# Altium PCB AX5243_module_pcb.PcbDoc
Units mm, origin at the board's own origin, x right, y up, seen from the top; angles counter-clockwise.
Board outline 49.91 x 49.91 mm, 2 copper layers (Top Layer, Bottom Layer); 40 components, 29 nets, 118 pads, 4 vias.
Unrouted connection lines stored in the file: 64.
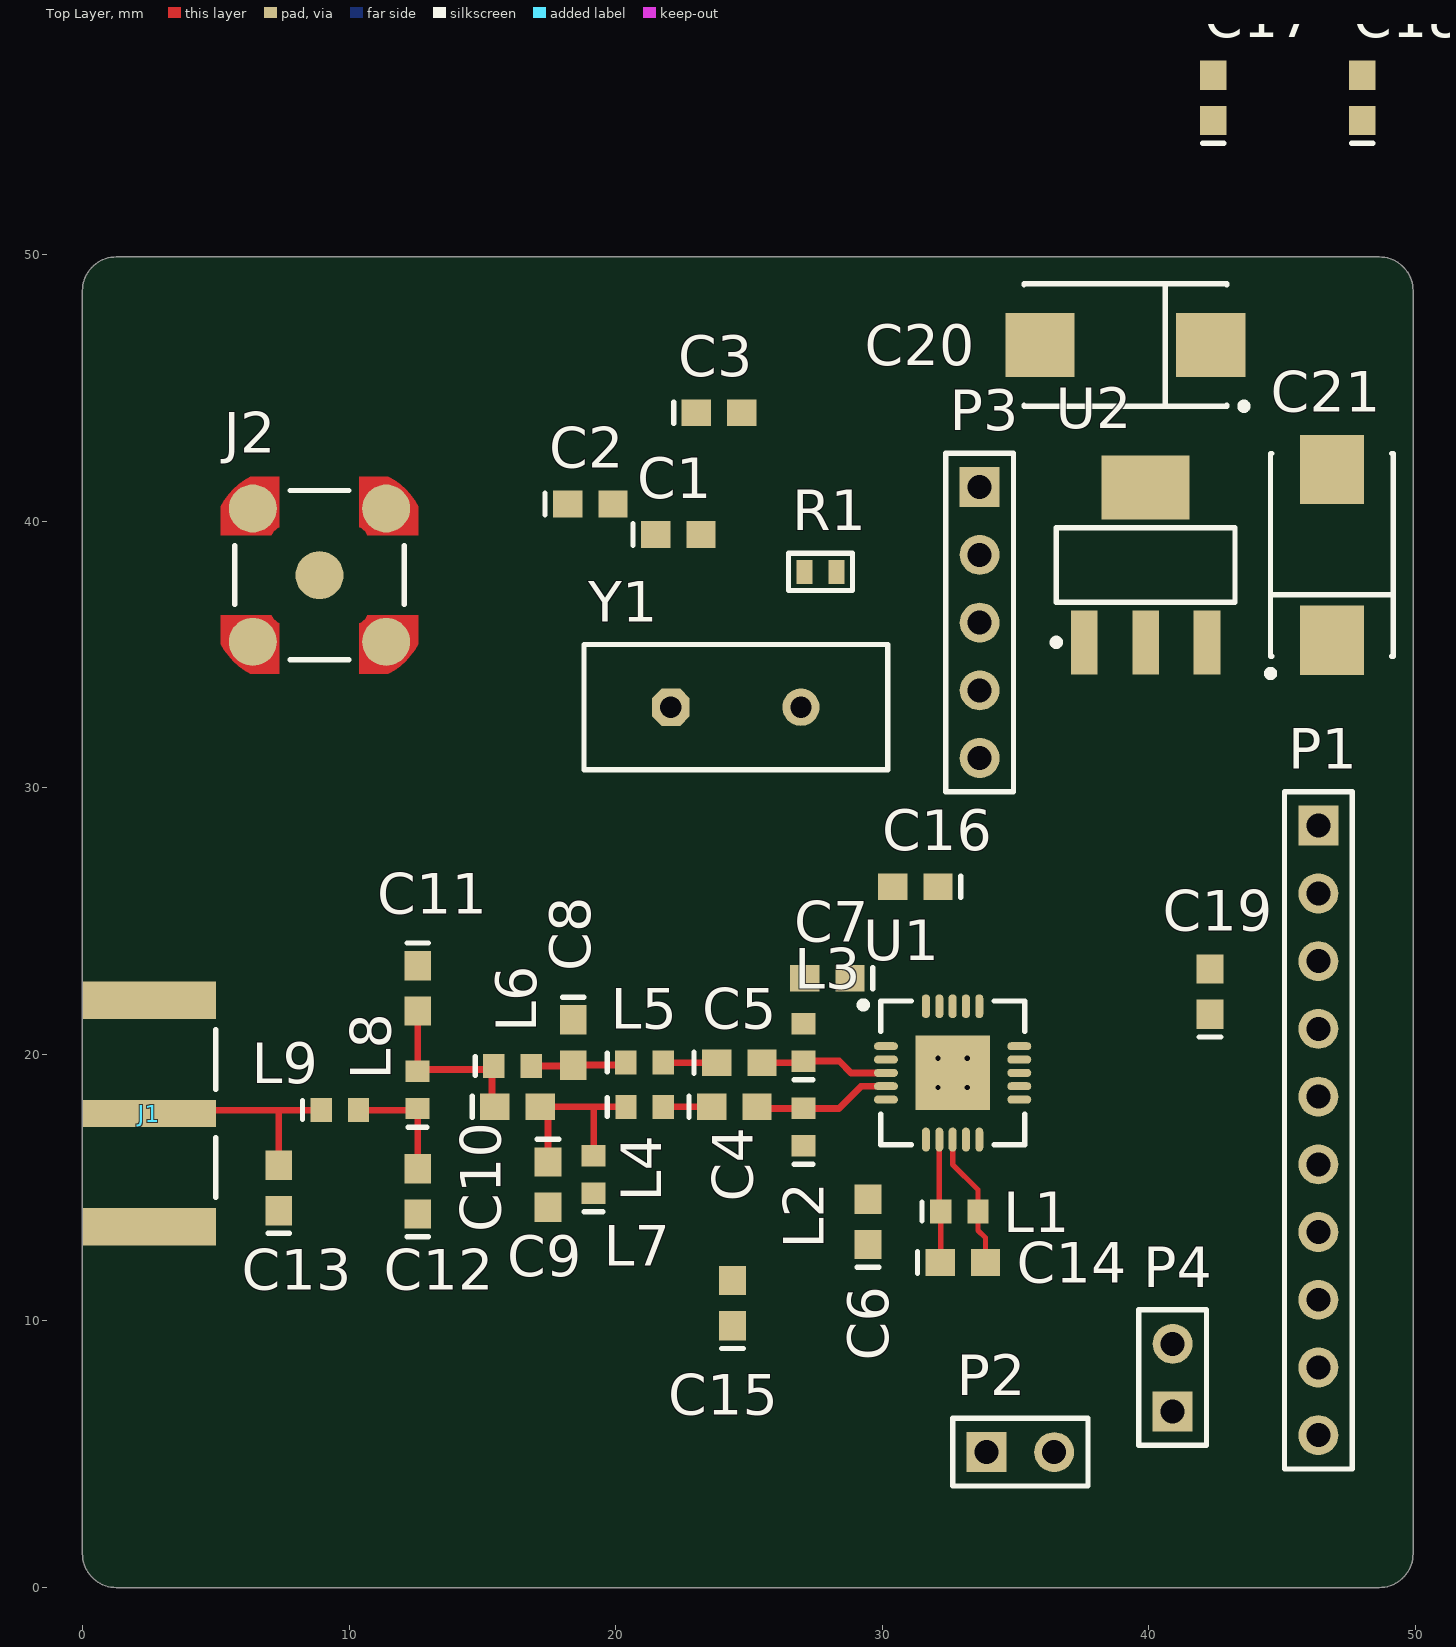
[diagram p0: Top Layer view]
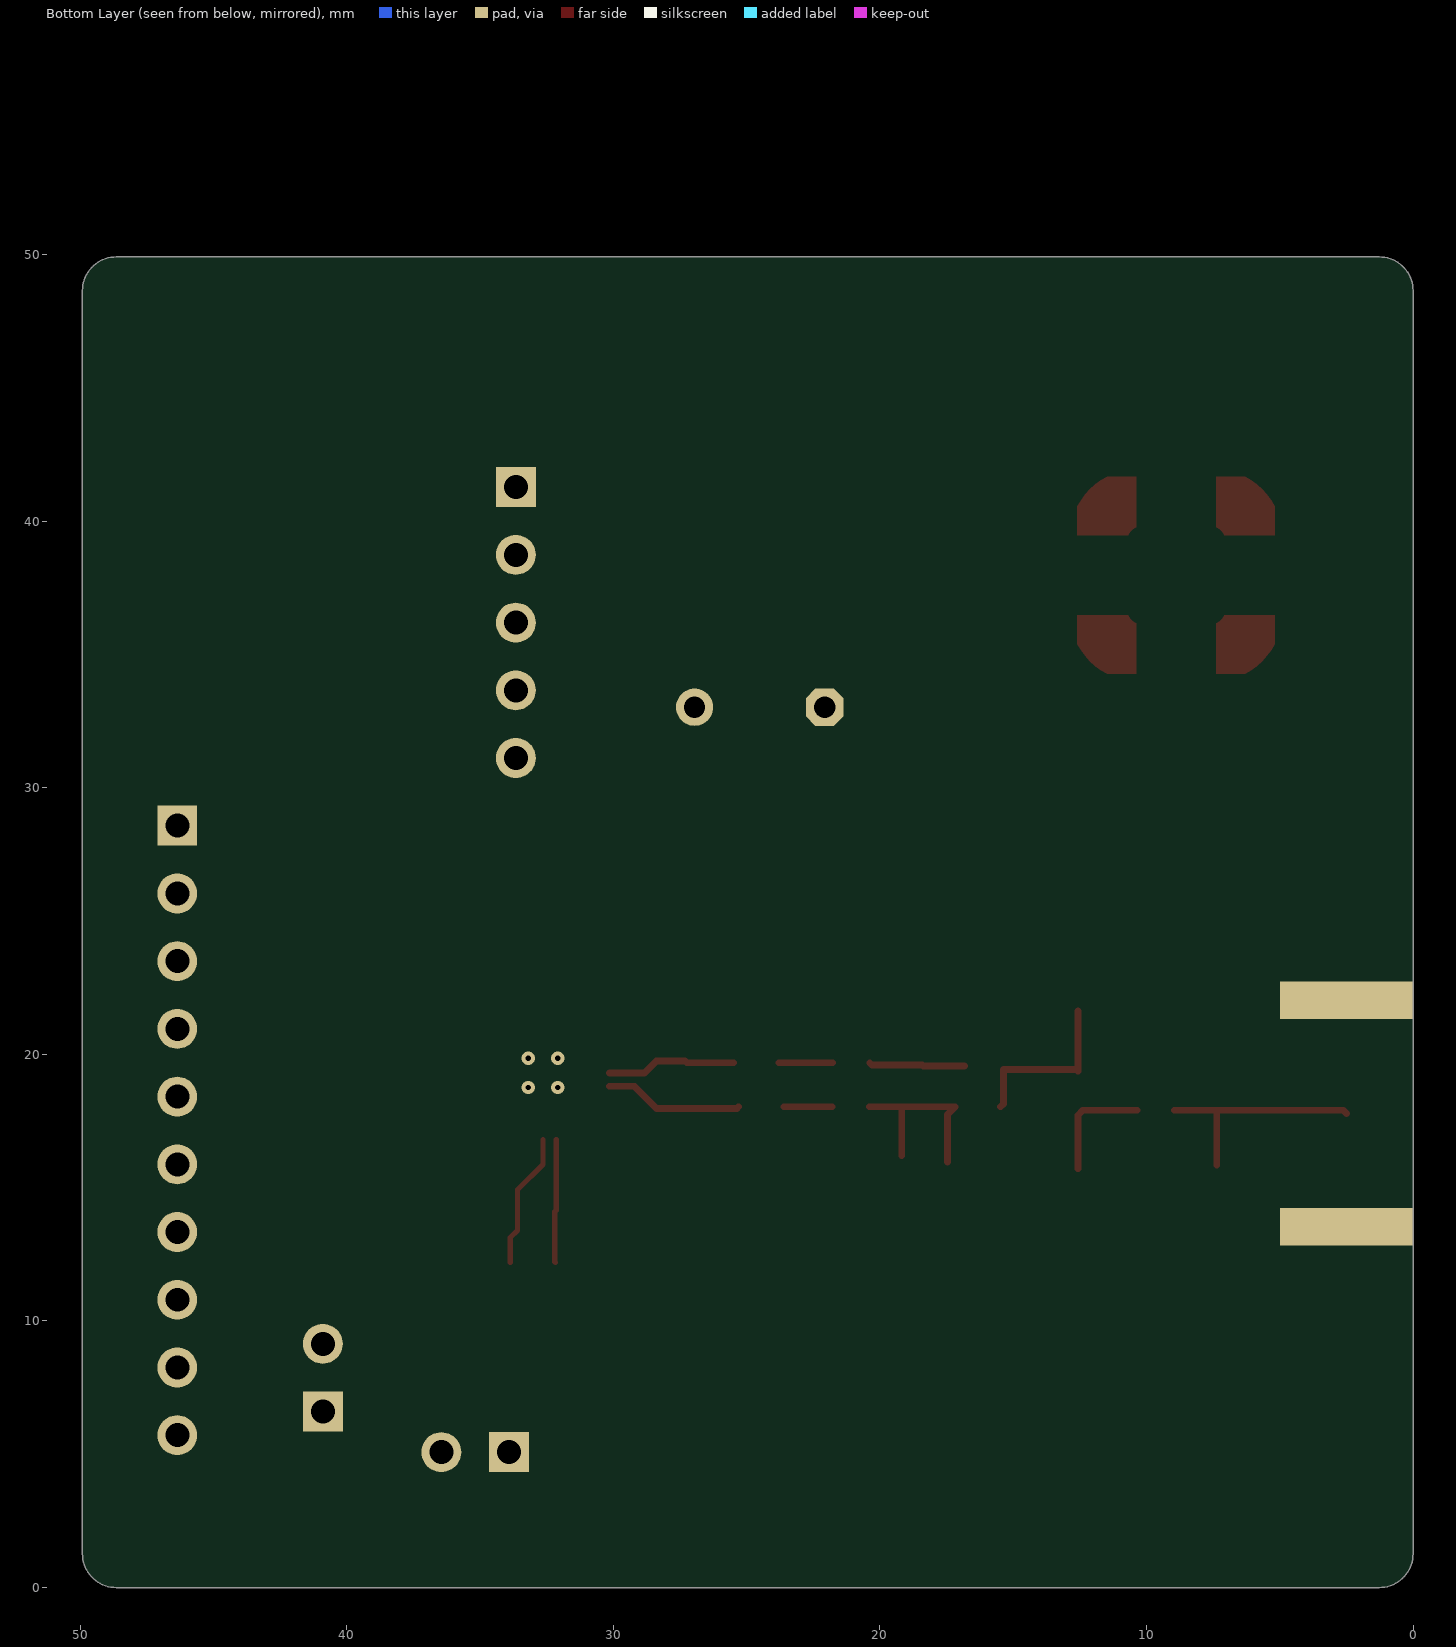
[diagram p1: Bottom Layer view, seen from below]

## Layer stack, top to bottom
Top Solder: solder mask 0.0102, Solder Resist, Dk 3.5
Top Layer: signal copper 0.0356
Dielectric 1: dielectric 0.32, FR-4, Dk 4.8
Bottom Layer: signal copper 0.0356
Bottom Solder: solder mask 0.0102, Solder Resist, Dk 3.5

## Board outline
0,1.27 0,48.641 cw(c1.27,48.641) 1.27,49.911 48.641,49.911 cw(c48.641,48.641) 49.911,48.641 49.911,1.27 cw(c48.641,1.27) 48.641,0 1.27,0 cw(c1.27,1.27)

## Design rules (kind name [scope] priority, off if disabled: settings)
Clearance [All] p1: gap=0.2 ignorepadtopadclearanceinfootprint=FALSE
PolygonConnect [All] p1: connectstyle=Relief reliefconductorwidth=0.254 reliefentries=4 polygonreliefangle="90 Angle" airgapwidth=0.254
RoomDefinition AX5243_schema [InComponentClass('AX5243_schema')] p1: confinementstyle=ConfineIn formatcopy=TRUE lockcomponents=FALSE outline 51.054,1.524 59.944,1.524 59.944,7.112 51.054,7.112
RoutingVias [All] p1: holewidth=0.711 width=1.27 viastyle="Through Hole" minholewidth=0.711 minwidth=1.27 maxholewidth=0.711 maxwidth=1.27
SolderMaskExpansion [All] p1: expansion=0.102
Width [All] p1: maxlimit=4 minlimit=0.15 preferedwidth=0.25
30 further rules are at their usual default settings.

## Components (designator, comment, footprint, x,y, rotation, side; value= is the part's Value field where it differs from the comment)
C1 "C0603" 0603 22.352,39.497 r0 top value=1nF
C2 "C0603" 0603 19.05,40.64 r0 top value=1nF
C3 "C0603" 0603 23.876,44.069 r0 top value=6.8pF
C4 "C0603" 0603 24.449,18.034 r0 top value=10pF
C5 "C0603" 0603 24.638,19.685 r0 top value=10pF
C6 "C0603" 0603 29.464,13.716 r90 top value=10pF
C7 "C0603" 0603 27.94,22.86 r180 top value=10pF
C8 "C0603" 0603 18.415,20.447 r270 top value=12pF
C9 "C0603" 0603 17.464,15.113 r270 top value=0pF
C10 "C0603" 0603 16.321,18.034 r0 top value=12pF
C11 "C0603" 0603 12.573,22.479 r270 top value=75pF
C12 "C0603" 0603 12.573,14.859 r90 top value=130pF
C13 "C0603" 0603 7.366,14.986 r90 top value=75pF
C14 "C0603" 0603 33.02,12.192 r0 top value=100pF
C15 "C0603" 0603 24.384,10.668 r90 top value=100nF
C16 "C0603" 0603 31.242,26.289 r180 top value=100nF
C17 "C0603" 0603 42.418,55.88 r90 top value=100nF
C18 "C0603" 0603 48.006,55.88 r90 top value=100nF
C19 "C0603" 0603 42.291,22.352 r90 top value=100nF
C20 "T495D" D 39.116,46.609 r180 top value=15uF
C21 "T495D" D 46.863,38.735 r90 top value=15uF
J1 "32K145-400L5" ROS-32K145-400L5_V 0,17.78 r90 top
J2 "32K10A-40ML5" ROS-32K10A-40ML5_V 8.89,37.973 r90 top
L1 "Inductor" INDC1608L 32.893,14.097 r0 top value=120nH
L2 "Inductor" INDC1608L 27.051,17.272 r90 top value=150nH
L3 "Inductor" INDC1608L 27.051,20.447 r90 top value=150nH
L4 "Inductor" INDC1608L 21.085,18.034 r0 top value=120nH
L5 "Inductor" INDC1608L 21.082,19.685 r0 top value=120nH
L6 "Inductor" INDC1608L 16.129,19.558 r0 top value=68nH
L7 "Inductor" INDC1608L 19.177,15.494 r90 top value=120nH
L8 "Inductor" INDC1608L 12.573,18.669 r90 top value=270nH
L9 "Inductor" INDC1608L 9.652,17.907 r0 top value=270nH
P1 "Header 10" HDR1X10 46.355,28.575 r270 top
P2 "ExtVCO" HDR1X2 33.909,5.08 r0 top
P3 "GP ADC" HDR1X5 33.655,41.275 r270 top
P4 "Ext VCO Tune" HDR1X2 40.894,6.604 r90 top
R1 "1k 0603" R0603 27.686,38.1 r0 top
U1 "AX5243" "QFN20 4,00x4,00mm ON Semi" 32.664,19.279 r0 top
U2 "LM1117IMP-3.3/NOPB" MP04A_N 39.878,38.354 r90 top
Y1 "ECS-10-13-1" HC-49U 24.511,33.02 r0 top

## Footprints (in the part's own frame and the unit in brackets; to place one, negate y for a bottom-side part, rotate by r counter-clockwise, add the part's x,y. Pads: shape width x height; smd on the part's side, far side on the other; paste and mask are expansions set on the pad)
0603 [mm] "Chip Capacitor; Body 1.6 x 0.8 mm (LxW typ)"
  rect 1.1x1 smd: 1(-0.85,0) 2(0.85,0)
  silkscreen extent -1.7,-0.4 -1.7,0.4
D [mm] "Capacitor, SM Tantalum; Body 7.3 x 4.3 mm (LxW typ)"
  rect 2.6x2.4 smd: 1(-3.2,0) 2(3.2,0)
  silkscreen extent -4.58,-2.3 3.8,2.42
HC-49U [mm] "Quartz Crystal, Thru-Hole; 2 Leads; Body 11.35 x 4.65 x 13.46 mm (LxWxH max)"
  oct 1.4x1.4 hole 0.8: 1(-2.44,0)
  round 1.4 hole 0.8: 2(2.44,0)
  silkscreen extent -5.7,-2.35 5.7,2.35
HDR1X2 [mm] "Connector; Header; 2 Position"
  rect 1.5x1.5 hole 0.9: 1(0,0)
  round 1.5 hole 0.9: 2(2.54,0)
  silkscreen extent -1.27,-1.27 3.81,1.27
HDR1X5 [mm] "Connector; Header; 5 Position"
  rect 1.5x1.5 hole 0.9: 1(0,0)
  round 1.5 hole 0.9: 2(2.54,0) 3(5.08,0) 4(7.62,0) 5(10.16,0)
  silkscreen extent -1.27,-1.27 11.43,1.27
HDR1X10 [mm] "Connector; Header; 10 Position"
  rect 1.5x1.5 hole 0.9: 1(0,0)
  round 1.5 hole 0.9: 2(2.54,0) 3(5.08,0) 4(7.62,0) 5(10.16,0) 6(12.7,0) 7(15.24,0) 8(17.78,0) 9(20.32,0) 10(22.86,0)
  silkscreen extent -1.27,-1.27 24.13,1.27
INDC1608L [mm] "Chip Inductor, Body 1.6x0.8mm, IPC High Density"
  rect 0.8x0.9 smd: 1(-0.7,0) 2(0.7,0)
  silkscreen extent -1.4,-0.35 -1.4,0.35, body extent -0.87,-0.48 0.87,0.48, height 0.55
MP04A_N [mm] "SOT223, 4-Leads, Body 6.5x3.5mm, Pitch 2.3mm, Lead Span 7mm, IPC Medium Density"
  rect 2.4x1 smd: 1(-2.9,2.3) 2(-2.9,0) 3(-2.9,-2.3)
  rect 2.4x3.3 smd: 4(2.9,0)
  silkscreen extent -3.02,-3.35 1.4,3.47, body extent -1.86,-3.35 1.86,3.35, height 1.8
"QFN20 4,00x4,00mm ON Semi" [mm] "QFN20 4,00x4,00mm ON Semi"
  oval 0.9x0.3 smd: 1(-2.525,1.025) 2(-2.525,0.525) 3(-2.525,0.025) 4(-2.525,-0.475) 5(-2.525,-0.975) 11(2.475,-0.975) 12(2.475,-0.475) 13(2.475,0.025) 14(2.475,0.525) 15(2.475,1.025)
  oval 0.3x0.9 smd: 6(-1.025,-2.475) 7(-0.525,-2.475) 8(-0.025,-2.475) 9(0.475,-2.475) 10(0.975,-2.475) 16(0.975,2.525) 17(0.475,2.525) 18(-0.025,2.525) 19(-0.525,2.525) 20(-1.025,2.525)
  rect 2.8x2.8 smd: 21(-0.025,0.025)
  silkscreen extent -3.5,-2.67 2.67,2.73, body extent -2.63,-2.57 2.57,2.63, height 1
R0603 [mm]
  rect 0.6x0.9 smd: 1(-0.6,0) 2(0.6,0)
  silkscreen extent -1.2,-0.7 1.2,0.7
ROS-32K10A-40ML5_V [mm] "SMA Straight Jack, Press-Fit, 6.35x6.35x9.5mm, Rosenberger Recommended"
  round 1.8 smd: 1(0,0) MP(-2.5,-2.5) MP(-2.5,2.5) MP(2.5,-2.5) MP(2.5,2.5)
  Top Layer region: 1.8,-1.5 1.68,-1.68 1.5,-1.8 1.5,-1.8 1.5,-3.7 2.587,-3.7 3.229,-3.229 3.7,-2.587 3.7,-2.587 3.7,-1.5
  Top Layer region: -1.5,-1.8 -1.68,-1.68 -1.8,-1.5 -1.8,-1.5 -3.7,-1.5 -3.7,-2.587 -3.229,-3.229 -2.587,-3.7 -2.587,-3.7 -1.5,-3.7
  Top Layer region: -1.8,1.5 -1.68,1.68 -1.5,1.8 -1.5,1.8 -1.5,3.7 -2.587,3.7 -3.229,3.229 -3.7,2.587 -3.7,2.587 -3.7,1.5
  Top Layer region: 1.5,1.8 1.68,1.68 1.8,1.5 1.8,1.5 3.7,1.5 3.7,2.587 3.229,3.229 2.587,3.7 2.587,3.7 1.5,3.7
  silkscreen extent -3.18,-3.18 3.18,3.18, body extent -3.17,-3.17 3.18,3.18, height 9.5
ROS-32K145-400L5_V [mm] "SMA Right Angle Jack, Edge Mount, 14.25x9.5x4.46mm, Rosenberger Recommended"
  rect 1x5 smd: 1(0,-2.5)
  rect 1.4x5 smd: MP(-4.25,-2.5) MP(4.25,-2.5)
  rect 1.4x5 smd far side paste-2: ""(-4.25,-2.5) ""(4.25,-2.5)
  silkscreen extent -3.15,-5 3.15,-5, body extent -4.75,-4.75 4.75,9.5, height 4.46

## Part data
C1 C2 C3 C4 C5 C6 C7 C8 C9 C10 C11 C12 C13 C14 C15 C16 C17 C18 C19: "Ceramic Chip Capacitor - Standard", PackageDocument=Mar-2001, Code_IPC="1608 [0603]", Code_JEITA=0603, ComponentLink1Description="Manufacturer Link", ComponentLink1URL=http://www.kemet.com/, ComponentLink2Description=Datasheet, ComponentLink2URL=http://www.kemet.com/kemet/web/homepage/kechome.nsf/vapubfilesname/F3102TA.pdf/$file/F3102TA.pdf, DatasheetDocument=Mar-2001, LatestRevisionDate=19-Mar-2004, LatestRevisionNote="Silkscreen size reduced.", Note="Footprint corresponds to dimensions for bulk cassette packaging. This case size has tightened tolerances.", PackageReference=0603, Published=17-Jul-2002, Publisher="Altium Limited"
C20 C21: "Solid Tantalum Chip Capacitor, Standard T495 Series - Low ESR, Surge Robust", PackageDocument=Mar-2001, Code_JEITA=7343-31, ComponentLink1Description="Manufacturer Link", ComponentLink1URL=http://www.kemet.com/, ComponentLink2Description=Datasheet, ComponentLink2URL=http://www.kemet.com/kemet/web/homepage/kechome.nsf/vapubfilesname/F3102TA.pdf/$file/F3102TA.pdf, DatasheetDocument=Mar-2001, LatestRevisionDate=19-Mar-2004, LatestRevisionNote="Silkscreen dimensions re-sized.", PackageReference=D, Published=17-Jul-2002, Publisher="Altium Limited"
J1: "SMA Right Angle Jack, Edge Mount, Up to 18 GHz, -55 to 155 degC", ComponentLink1Description="Manufacturer URL", ComponentLink1URL=http://www.rosenberger.de, ComponentLink2Description=Datasheet, ComponentLink2URL=http://rosenberger.de/ok/images/documents/db/32K145-400L5.pdf, ComponentLink3Description="Package Specification", ComponentLink3URL=http://rosenberger.de/ok/images/documents/db/32K145-400L5.pdf, ComponentLink4Description="Series Overview / Design Note", ComponentLink4URL=http://rosenberger.de/ok/images/documents/spez/32.pdf, ComponentLink5Description="Webshop / RFQ", ComponentLink5URL=http://www.rosenberger.com/en/contact/sales/, DatasheetVersion=b00, Desgin Note 2="For more information about DRC setting, please look at following webpage, http://techdocs.altium.com/display/SCRT/Design+Rule+for+Edge-Mount+Connectors", Design Note 1="Footprint in library is a generic example - only application specific footprint delivers High Performance", Mounting Technology="Surface Mount", PackageDescription="SMA Right Angle Jack, Edge Mount, 14.25 x 9.5 x 4.46 mm", PackageReference=32K145-400L5, PackageVersion=b00, PartNumber=32K145-400L5
J2: "SMA Straight Jack, Up to 12.4 GHz, -55 to 155 degC", ComponentLink1Description="Manufacturer URL", ComponentLink1URL=http://www.rosenberger.de, ComponentLink2Description=Datasheet, ComponentLink2URL=http://rosenberger.de/ok/images/documents/db/32K10A-40ML5.pdf, ComponentLink3Description="Package Specification", ComponentLink3URL=http://rosenberger.de/ok/images/documents/db/32K10A-40ML5.pdf, ComponentLink4Description="Series Overview / Design Note", ComponentLink4URL=http://rosenberger.de/ok/images/documents/spez/32.pdf, ComponentLink5Description="Webshop / RFQ", ComponentLink5URL=http://www.rosenberger.com/en/contact/sales/, DatasheetVersion=e00, Design Note="Footprint in library is a generic example - only application specific footprint delivers High Performance", Mounting Technology="Surface Mount", PackageDescription="SMA Straight Jack, Press-Fit, 6.35 x 6.35 x 9.5 mm", PackageReference=32K10A-40ML5, PackageVersion=e00, PartNumber=32K10A-40ML5
P1: "Header, 10-Pin", LatestRevisionDate=17-Jul-2002, LatestRevisionNote="Re-released for DXP Platform.", Publisher="Altium Limited"
P2 P4: library part "Header 2", "Header, 2-Pin", LatestRevisionDate=17-Jul-2002, LatestRevisionNote="Re-released for DXP Platform.", Publisher="Altium Limited"
P3: library part "Header 5", "Header, 5-Pin", LatestRevisionDate=17-Jul-2002, LatestRevisionNote="Re-released for DXP Platform.", Publisher="Altium Limited"
U1: "Data Tranceiver 27-1050MHz", Case/Package=QFN, Current - Receiving=11mA, Current - Transmitting=48mA, Frequency=27MHz, Manufacturer 2="ON Semiconductor", Manufacturer Part Number 2=AX5243-1-TA05, Max Frequency=1.05GHz, Max Operating Temperature=85°C, Max Supply Voltage=3.6V, Min Operating Temperature=-40°C, Min Supply Voltage=1.8V, Supplier Part Number 1=863-AX5243-1-TA05, ComponentLink1Description=http://www.onsemi.com/pub/Collateral/AX5243-D.PDF, ComponentLink1URL=http://www.onsemi.com/pub/Collateral/AX5243-D.PDF, ComponentLink2Description=http://www.farnell.com/datasheets/2009300.pdf, ComponentLink2URL=http://www.farnell.com/datasheets/2009300.pdf, Data Rate=125Kbps, Interface=SPI, Lead Free="Lead Free", Mount="Surface Mount", Number of Pins=20, Packaging="Tape and Reel", Pricing 2="1=2.34, 10=2.117, 100=1.701 (USD)", REACH SVHC="No SVHC", Sensitivity=-137dBm, Stock 2=0, Supplier 1=Mouser, Supplier 2=Digi-Key, Supplier Part Number 2=AX5243-1-TA05OSCT-ND
U2: "800mA Low-Dropout Linear Regulator, 4-pin SOT-223, Pb-Free", Manufacturer="National Semiconductor", PackageTopMarking=XYTT*N05B, PowerWise=N, Code_IPC=SOT223-4, Code_JEDEC=TO-261-AA, ComponentLink1Description="Manufacturer URL", ComponentLink1URL=http://www.national.com/, ComponentLink2Description="LM1117 Datasheet", ComponentLink2URL=http://www.national.com/ds/LM/LM1117.pdf, ComponentLink3Description="LM1117 Web Page", ComponentLink3URL=http://www.national.com/pf/LM/LM1117.html, ComponentLink4Description="MP04A Package Page", ComponentLink4URL=http://www.national.com/packaging/folders/mp04a.html, CompType="LDO IC", DatasheetVersion=Apr-2006, High-Reliability=Y, PackageDescription="Molded SOT-223, 6.50 x 3.56 x 1.6mm Body, 4 Lead, 2.3mm Pitch", PackageReference=MP04A, PackageVersion="revB, Apr-2003", PartNumber=LM1117IMP-3.3/NOPB, PinCount=4, RoHS=Y
Y1: "Crystal Oscillator", ComponentLink1Description="Manufacturer Link", ComponentLink1URL=http://www.ecsxtal.com/, ComponentLink2Description=Datasheet, ComponentLink2URL=http://www.ecsxtal.com/pdf2/HC49U.PDF, DatasheetDocument=18-Apr-2000, PackageReference=HC-49U, Published=17-Jul-2002, Publisher="Altium Limited"
L1 L2 L3 L4 L5 L6 L7 L8 L9: Code_IEC=1005, Code_JEITA=0402, LatestRevisionDate=29-May-2009, LatestRevisionNote="IPC-7351 Footprint Added.", PackageDescription="Chip Inductor", PackageReference=0402-A, Published=8-Jun-2000, Publisher="Altium Limited"

## Via types
v1: diameter 0.5, hole 0.2, Top Layer to Bottom Layer, 4 vias

## Nets (pads, with @x,y where several pads share a name; then routed paths per layer and width w, separated by ;. In a path a pad name is that pad's centre, name@x,y a point inside that pad or via, vN(x,y) a via of type N, cw(c..) or ccw(c..) an arc to the next point about the centre after c; other vN are vias at no path point)
3.3VDC: C18.2 C19.1 C20.1 P1.4 U1.16 U2.2
GND: C1.2 C3.2 C6.1 C7.2 C8.1 C9.2 C11.1 C12.1 C13.1 C15.1 C16.1 C17.1 C18.1 C19.2 C20.2 C21.2 J1.MP J2.MP L2.1 L3.2 L7.1 P1.2 P1.3 P3.1 P3.4 P4.2 U1.2 U1.21 U2.1
  other v1: 32.089,18.754 33.189,18.754 32.089,19.854 33.189,19.854
NetC1_1: C1.1 R1.2 U1.19 Y1.2
NetC2_1: C2.1 C3.1 R1.1 U1.20 Y1.1
NetC2_2: C2.2 J2.1
NetC4_1: C4.1 L4.2 | length 1.8
  Top Layer w0.254: L4.2 C4.1
NetC4_2: C4.2 C6.2 L2.2 U1.4 | length 5.2
  Top Layer w0.254: C4.2 25.361,17.972 L2.2 28.378,17.972 29.202,18.796 29.21,18.796 ; 29.202,18.804 U1.4
NetC5_1: C5.1 L5.2 | length 2
  Top Layer w0.254: L5.2 C5.1
NetC5_2: C5.2 C7.1 L3.1 U1.3 | length 4.9
  Top Layer w0.254: C5.2 27.243,19.685 27.305,19.747 28.386,19.747 28.829,19.304 U1.3
NetC8_2: C8.2 L5.1 L6.2 | length 3.6
  Top Layer w0.254: L6.2 18.376,19.558 C8.2 20.294,19.597 L5.1
NetC9_1: C9.1 C10.2 L4.1 L7.2 | length 7.2
  Top Layer w0.254: C9.1 17.464,17.741 C10.2 19.177,18.034 ; L7.2 19.177,18.034 ; L4.1 19.177,18.034
NetC10_1: C10.1 C11.2 L6.1 L8.2 | length 6.5
  Top Layer w0.254: C11.2 L8.2 12.635,19.431 14.351,19.431 15.364,19.431 15.364,18.141 C10.1
NetC12_2: C12.2 L8.1 L9.2 | length 4.3
  Top Layer w0.254: L9.2 12.383,17.907 12.573,17.717 C12.2
NetC13_2: C13.2 J1.1 L9.1 | length 8.6
  Top Layer w0.254: J1.1 2.627,17.907 7.366,17.907 ; C13.2 7.366,17.907 ; L9.1 7.366,17.907
NetC14_1: C14.1 L1.1 P2.1 U1.7 | length 4.6
  Top Layer w0.2: U1.7 32.139,14.151 L1.1 32.193,12.215 C14.1
NetC14_2: C14.2 L1.2 P2.2 U1.8 | length 5.1
  Top Layer w0.2: U1.8 32.639,15.875 33.593,14.921 L1.2 33.593,13.397 33.87,13.12 C14.2
NetC15_2: C15.2 U1.5
NetC16_2: C16.2 U1.1
NetP1_5: P1.5 U1.15
NetP1_6: P1.6 U1.14
NetP1_7: P1.7 U1.13
NetP1_8: P1.8 U1.12
NetP1_9: P1.9 U1.11
NetP1_10: P1.10 U1.10
NetP3_2: P3.2 U1.18
NetP3_3: P3.3 U1.17
NetP3_5: P3.5 U1.9
NetP4_1: P4.1 U1.6
VCC: C17.2 C21.1 P1.1 U2.3
pads on no net: J1. U2.4

## Silkscreen, mask and mechanical layers (free items; w line width, h text height)
Mechanical 1:
  lines w0.5: 0,1.27 ccw(c1.27,1.27) 1.27,0 48.641,0 ccw(c48.641,1.27) 49.911,1.27 49.911,48.641 ccw(c48.641,48.641) 48.641,49.911 1.27,49.911 ccw(c1.27,48.641) 0,48.641 0,6.35 0,1.27

## Text inside footprints (layer, text, board x,y; h text height)
J1: Mechanical 3 "Board Edge" at 0,9.68 h0.2 r90